# EAGLE board FET_mux (EAGLE 9.1.0)
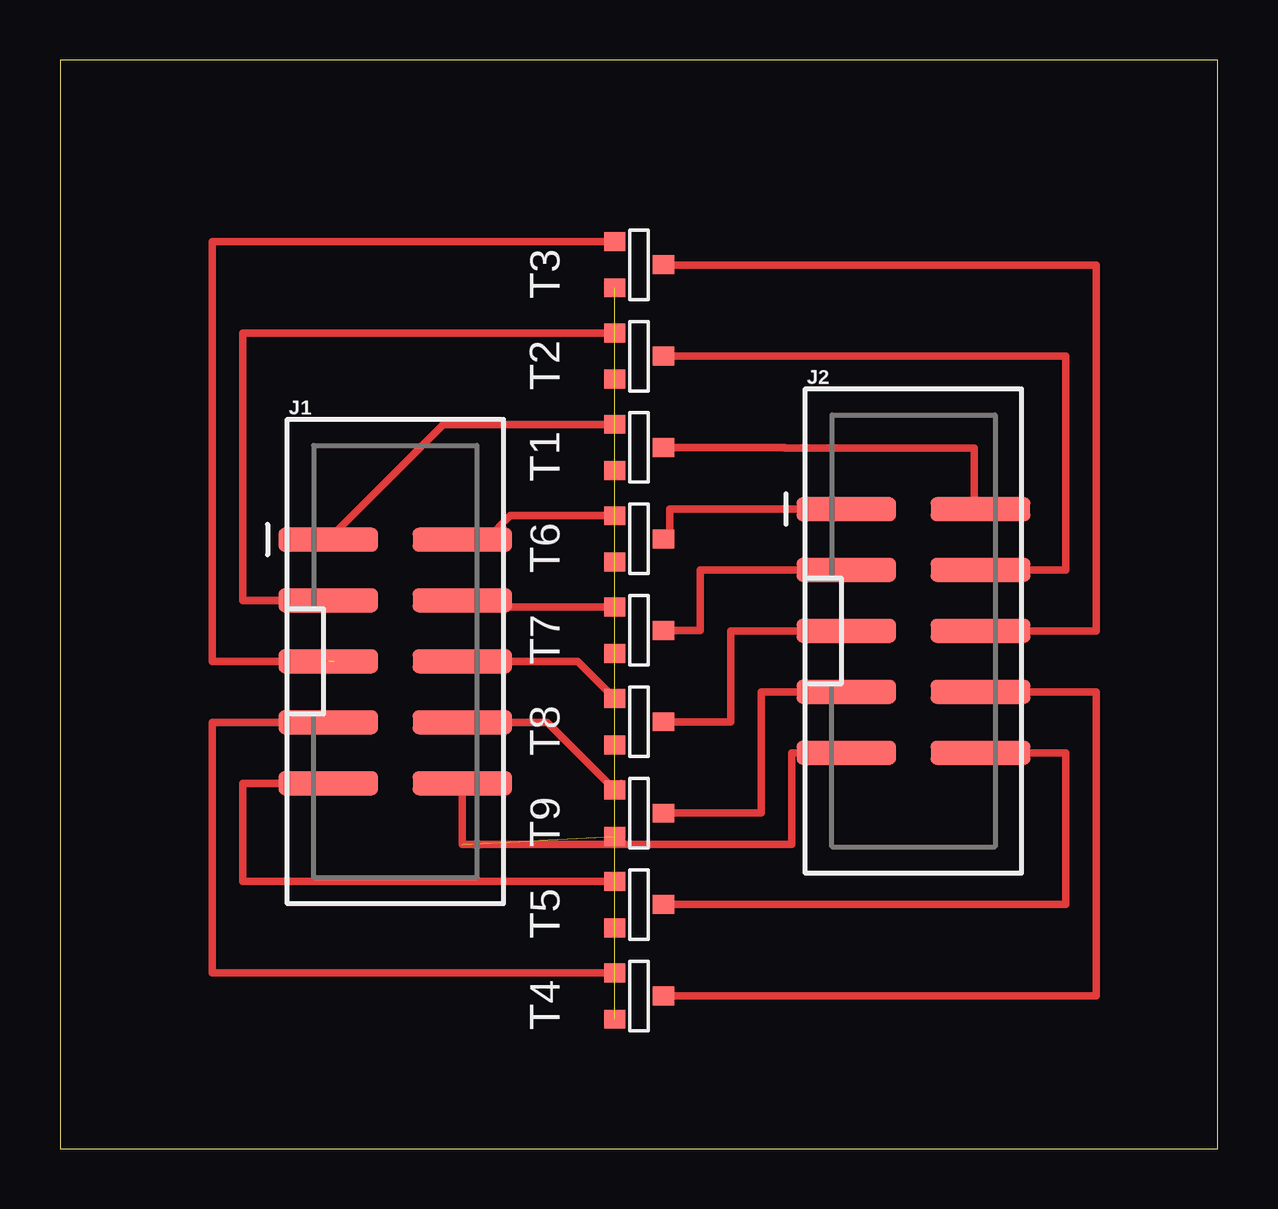
[diagram p0: board, top side]
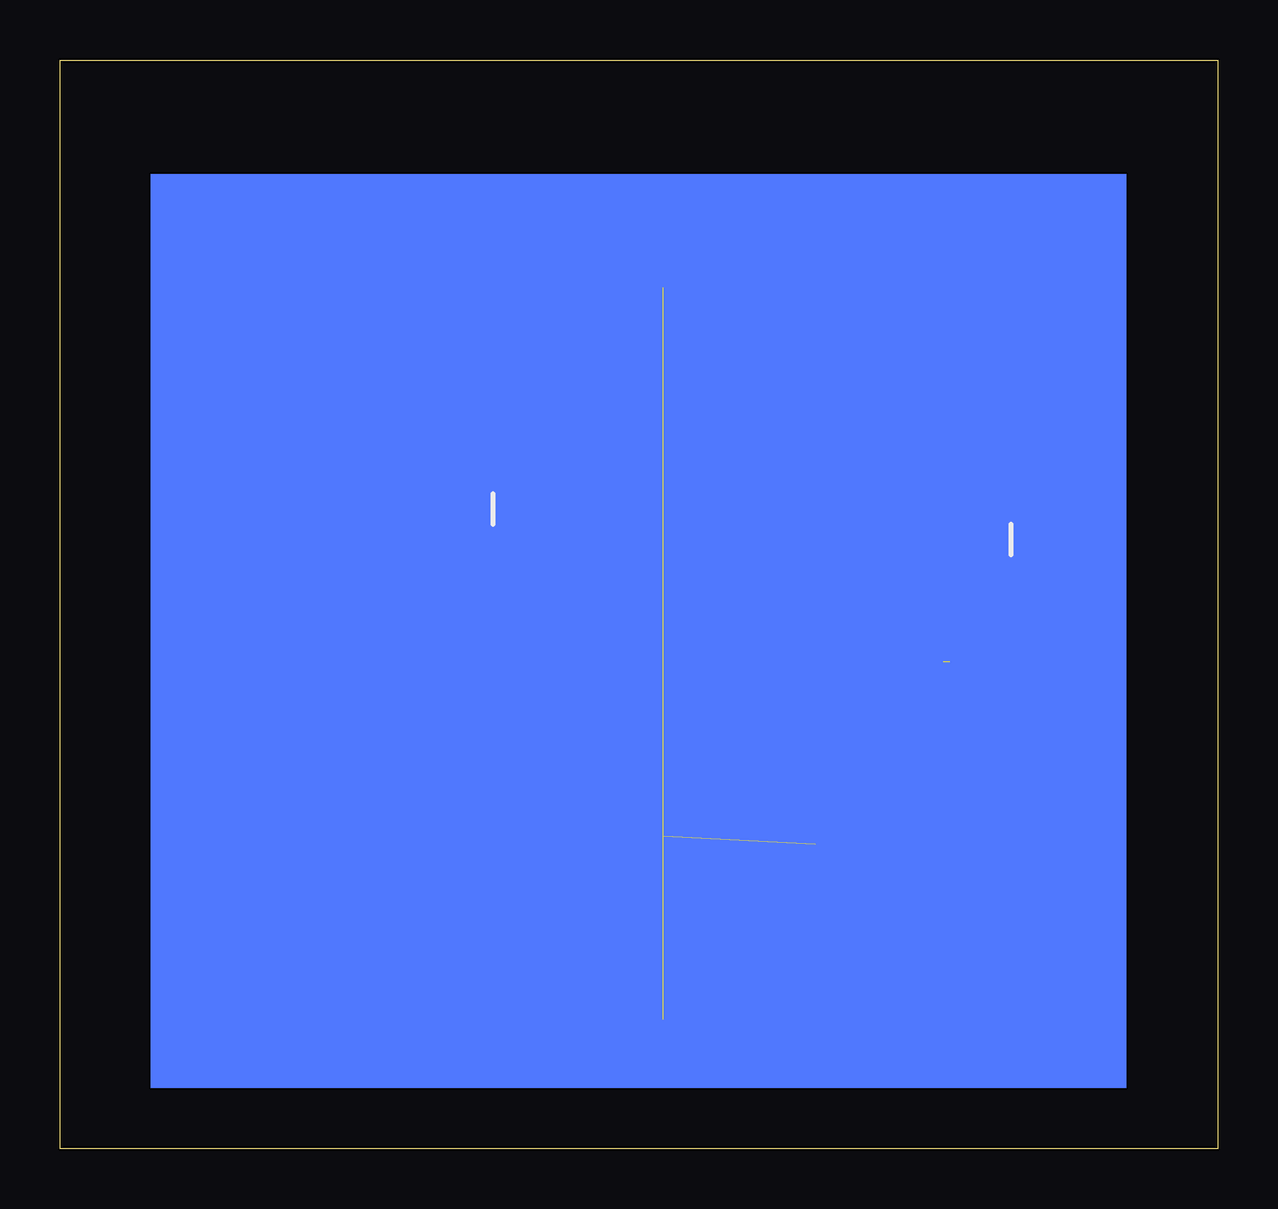
[diagram p1: board, bottom side, seen from below]

Size 48.24 x 45.39 mm. Coordinates in mm from the lower left corner, seen from the top.
Outline: 0,0 48.24,0 48.24,45.39 0,45.39 0,0
Copper layers (1*16): Top 0.035mm / dielectric 1.5mm / Bottom 0.035mm
Design rules "default": minimum track width 6mil, minimum drill 0.35mm, track to track 6mil, track to pad 6mil, pad to pad 6mil, via to via 6mil, smd to smd 6mil, copper to edge 40mil, drill to drill 6mil, minimum pad ring 10mil, minimum via ring 8mil, stop-mask expansion 4mil, vias tented up to drill 0mil, thermal gap 10mil

## Footprints (pad centres in the part's own frame; a part is rotated, then mirrored left to right if it is on the bottom)
2X5-SHROUDED_SMD = smd 4.15 x 1: 1 -2.794,5.08; 2 2.794,5.08; 3 -2.794,2.54; 4 2.794,2.54; 5 -2.794,0; 6 2.794,0; 7 -2.794,-2.54; 8 2.794,-2.54; 9 -2.794,-5.08; 10 2.794,-5.08
SOT-23 = smd 0.787 x 0.889: 1 0.025,-1.016; 2 -0.94,1.016; 3 0.991,1.016

## Placement (x,y rotation side)
J1  [2X5-SHROUDED_SMD]  13.97,20.32 0 top
J2  [2X5-SHROUDED_SMD]  35.56,21.59 0 top
T1  [SOT-23]  24.13,29.21 90 top
T2  [SOT-23]  24.13,33.02 90 top
T3  [SOT-23]  24.13,36.83 90 top
T4  [SOT-23]  24.13,6.35 90 top
T5  [SOT-23]  24.13,10.16 90 top
T6  [SOT-23]  24.13,25.4 90 top
T7  [SOT-23]  24.13,21.59 90 top
T8  [SOT-23]  24.13,17.78 90 top
T9  [SOT-23]  24.13,13.97 90 top

## Library data of the parts
J1 J2 = fab; PROD_ID: CONN-09508
T1-T9 = fab

## Nets
C1: J2.2 T1.1
C2: J2.4 T2.1
C3: J2.6 T3.1
C4: J2.8 T4.1
C5: J2.10 T5.1
C6: J2.1 T6.1
C7: J2.3 T7.1
C8: J2.5 T8.1
C9: J2.7 T9.1
GND: J1.10 J2.9 T1.2 T2.2 T3.2 T4.2 T5.2 T6.2 T7.2 T8.2 T9.2
P05: J1.8 T9.3
P06: J1.6 T8.3
P07: J1.4 T7.3
P08: J1.2 T6.3
P09: J1.9 T5.3
P10: J1.7 T4.3
P11: J1.5 T3.3
P12: J1.3 T2.3
P13: J1.1 T1.3

## Tracks (layer width: path | path; a pad name or v marks a point on that pad's centre or on a via)
C1
  Top 0.305: T1.1 30.2,29.23 30.2,29.21 38.1,29.21 38.1,26.92 J2.2
C2
  Top 0.305: T2.1 41.91,33.05 41.91,24.13 J2.4 38.1,24.13
C3
  Top 0.305: T3.1 25.15,36.83 43.18,36.83 43.18,21.59 J2.6
C4
  Top 0.305: T4.1 43.18,6.38 43.18,19.05 J2.8 38.1,19.05
C5
  Top 0.305: T5.1 41.91,10.19 41.91,16.51 J2.10
C6
  Top 0.305: T6.1 25.4,25.43 25.4,26.67 J2.1
C7
  Top 0.305: T7.1 26.67,21.61 26.67,24.13 J2.3 33.02,24.13 34.29,24.13
C8
  Top 0.305: T8.1 27.94,17.8 27.94,21.59 J2.5
C9
  Top 0.305: T9.1 29.21,13.99 29.21,19.05 J2.7
GND  (9 unrouted)
  Top 0.305: J2.9 30.48,16.51 30.48,12.7 16.76,12.7 J1.10
P05
  Top 0.305: 23.39,15.24 T9.3 20.3,17.78 J1.8
P06
  Top 0.305: T8.3 21.57,20.32 J1.6
P07
  Top 0.305: T7.3 17.04,22.58 J1.4
P08
  Top 0.305: T6.3 18.77,26.39 17.78,25.4 J1.2
P09
  Top 0.305: T5.3 7.62,11.15 7.62,15.24 J1.9 12.7,15.24
P10
  Top 0.305: T4.3 6.35,7.34 6.35,17.78 J1.7
P11  (1 unrouted)
  Top 0.305: T3.3 6.35,37.82 6.35,20.32 11.43,20.32
P12
  Top 0.305: T2.3 7.62,34.01 7.62,22.86 J1.3
P13
  Top 0.305: T1.3 15.98,30.2 J1.1
(copper drawn outside any net)
  shapes: Bottom area x1